# EAGLE board mic-preamp-stereo4 (EAGLE 6.2)
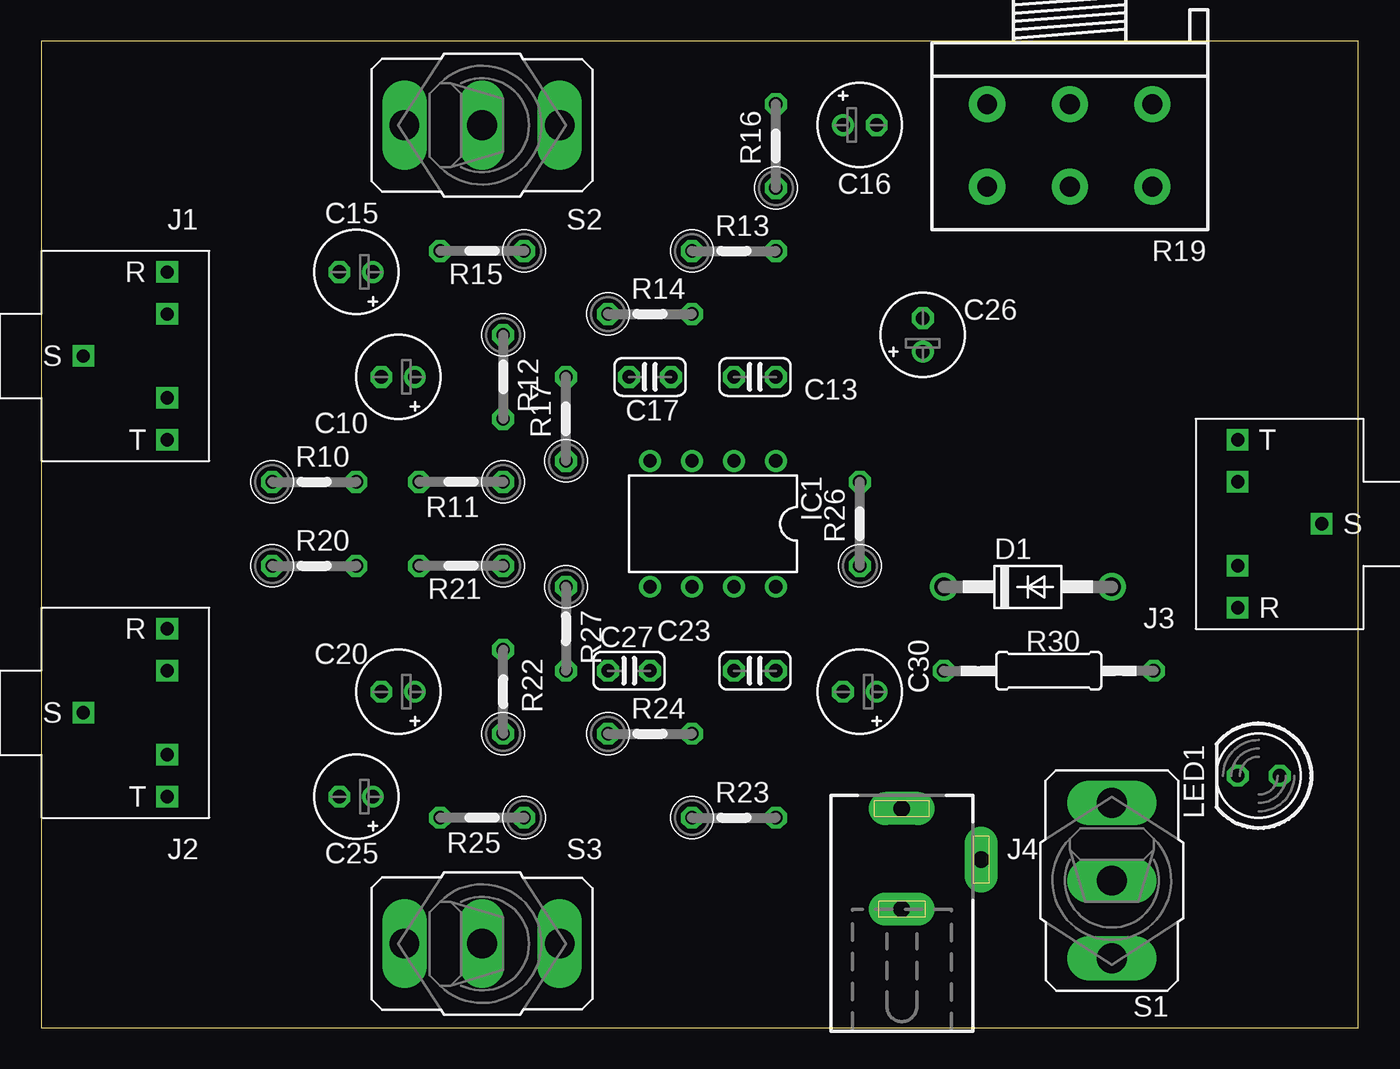
[diagram p0: board, top side]
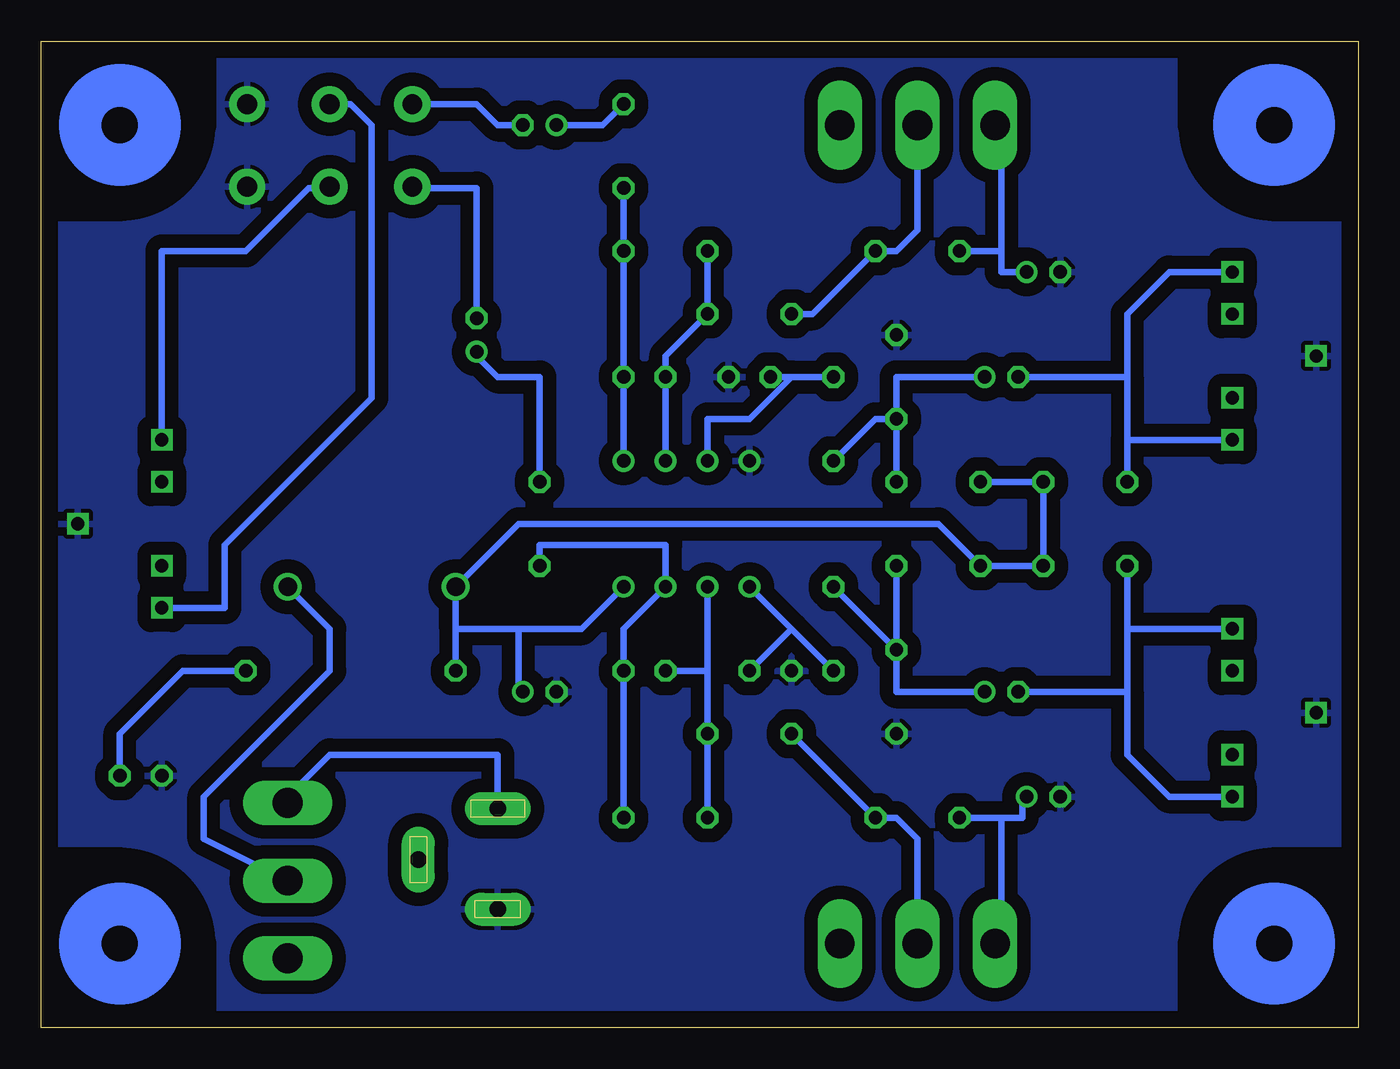
[diagram p1: board, bottom side, seen from below]

Size 79.68 x 59.68 mm. Coordinates in mm from the lower left corner, seen from the top.
Outline: 0,0 79.68,0 79.68,59.68 0,59.68 0,0
Copper layers 16: Bottom 0.035mm
Design rules: minimum track width 12mil, minimum drill 0.3mm, track to track 10mil, track to pad 10mil, pad to pad 10mil, via to via 10mil, smd to smd 10mil, copper to edge 40mil, drill to drill 8mil, minimum pad ring 10mil, minimum via ring 8mil, stop-mask expansion 8mil, vias tented up to drill 0mil, thermal gap 10mil
Net classes: 0 default: width 0.381 mm; 1 Ground: width 0.305 mm, clearance 0.229 mm
bRestrict: area 10.2,61 to 69.8,63.5; area 10.2,-3.8 to 69.8,-1.3; area -2.5,7.6 to -1.3,50.8; area -2.5,49.8 to 9.9,62.2; area 70.1,49.8 to 82.5,63.5; area 70.1,-2.5 to 82.5,9.9; area -2.5,-2.5 to 9.9,9.9; area 3.3,52.8 to 6.9,56.4; area 73.1,52.8 to 76.7,56.4; area 73.1,3.3 to 76.7,6.9; area 3.3,3.3 to 6.9,6.9

## Footprints (pad centres in the part's own frame; a part is rotated, then mirrored left to right if it is on the bottom)
E2-5 = drill 0.813 pad 1.27: + -1.016,0 | drill 0.813 pad 1.27 octagon: - 1.016,0
C025-024X044 = drill 0.813 octagon: 1 -1.27,0; 2 1.27,0
DO41-10 = drill 1.118: A 5.08,0; C -5.08,0
DIL08 = drill 0.813 pad 1.27: 1 -3.81,-3.81; 2 -1.27,-3.81; 3 1.27,-3.81; 4 3.81,-3.81; 5 3.81,3.81; 6 1.27,3.81; 7 -1.27,3.81; 8 -3.81,3.81
PICAXE_STEREOJACKSOCKET = drill 0.8 square: RING -5.08,-5.08; RING_SW -5.08,-2.54; SLEEVE 0,0; TIP -5.08,5.08; TIP_SW -5.08,2.54
DCJ0202 = drill 1 pad 2 long: 1 0,3.1; 2 4.8,0; 3 0,-3
LED5MM = drill 0.813 octagon: A -1.27,0; K 1.27,0
0207/5V = drill 0.813 octagon: 1 -2.54,0; 2 2.54,0
3RP/1610G = drill 1.2 pad 2.184: 1-1 -5,0; 1-2 0,0; 1-3 5,0; 2-1 -5,5; 2-2 0,5; 2-3 5,5
0207/12 = drill 0.813 octagon: 1 -6.35,0; 2 6.35,0
M9040P = drill 1.803 long: 1 0,4.699; 2 0,0; 3 0,-4.699

## Placement (x,y rotation side)
C10  2.2u  [E2-5]  21.59,39.37 180 top
C13  2.2p  [C025-024X044]  43.18,39.37 180 top
C15  10u  [E2-5]  19.05,45.72 180 top
C16  2.2u  [E2-5]  49.53,54.61 0 top
C17  4.7nF  [C025-024X044]  36.83,39.37 180 top
C20  2.2u  [E2-5]  21.59,20.32 180 top
C23  2.2p  [C025-024X044]  43.18,21.59 180 top
C25  10u  [E2-5]  19.05,13.97 180 top
C26  2.2u  [E2-5]  53.34,41.91 90 top
C27  4.7nF  [C025-024X044]  35.56,21.59 0 top
C30  47u  [E2-5]  49.53,20.32 180 top
D1  1N4004  [DO41-10]  59.69,26.67 0 top
IC1  TL072P  [DIL08]  40.64,30.48 180 top
J1  PICAXE_STEREOJACKSOCKET  [PICAXE_STEREOJACKSOCKET]  2.54,40.64 180 top
J2  PICAXE_STEREOJACKSOCKET  [PICAXE_STEREOJACKSOCKET]  2.54,19.05 180 top
J3  Stereo Out  [PICAXE_STEREOJACKSOCKET]  77.47,30.48 0 top
J4  DC 7-15VDC  [DCJ0202]  52.07,10.16 0 top
LED1  [LED5MM]  73.66,15.24 180 top
R10  10k  [0207/5V]  16.51,33.02 0 top
R11  27k  [0207/5V]  25.4,33.02 180 top
R12  27k  [0207/5V]  27.94,39.37 270 top
R13  33k  [0207/5V]  41.91,46.99 0 top
R14  1.5k  [0207/5V]  36.83,43.18 0 top
R15  27k  [0207/5V]  26.67,46.99 180 top
R16  100  [0207/5V]  44.45,53.34 90 top
R17  100  [0207/5V]  31.75,36.83 90 top
R19  [3RP/1610G]  62.23,55.88 180 top
R20  10k  [0207/5V]  16.51,27.94 0 top
R21  27k  [0207/5V]  25.4,27.94 180 top
R22  27k  [0207/5V]  27.94,20.32 90 top
R23  33k  [0207/5V]  41.91,12.7 0 top
R24  1.5k  [0207/5V]  36.83,17.78 0 top
R25  27k  [0207/5V]  26.67,12.7 180 top
R26  100  [0207/5V]  49.53,30.48 90 top
R27  100  [0207/5V]  31.75,24.13 270 top
R30  680  [0207/12]  60.96,21.59 180 top
S1  Power  [M9040P]  64.77,8.89 180 top
S2  [M9040P]  26.67,54.61 270 top
S3  [M9040P]  26.67,5.08 270 top

## Library data of the parts
C10 C13 C15-C17 C20 C23 C25-C27 C30 R10-R16 R20-R26 R30 = rcl
D1 = diode
IC1 = linear
J1-J3 = PICAXE_StereoJackSocket
J4 = con-jack; OC_FARNELL: unknown; OC_NEWARK: unknown
LED1 = led
R17 R27 = resistor
R19 = pot
S1-S3 = switch

## Nets
+9V: J4.1 S1.3
GND [Ground]: C15.- C17.1 C25.- C27.1 C30.- IC1.4 J1.SLEEVE J2.SLEEVE J3.SLEEVE J4.3 LED1.K R12.1 R19.1-1 R19.2-1 R22.1
N$1: C10.+ R11.1 R12.2 R17.1
N$2: C13.1 IC1.1 R13.2 R16.1
N$3: C13.2 IC1.2 R13.1 R14.2
N$4: C30.+ D1.C IC1.8 R10.2 R11.2 R20.2 R21.2 R30.2
N$5: R14.1 R15.1 S2.2
N$6: C16.+ R16.2
N$7: C10.- J1.RING J1.TIP R10.1
N$8: D1.A S1.2
N$9: C15.+ R15.2 S2.3
N$10: C16.- R19.1-3
N$11: LED1.A R30.1
N$12: C20.+ R21.1 R22.2 R27.1
N$13: C26.- R19.2-3
N$16: C23.1 IC1.7 R23.2 R26.1
N$17: C23.2 IC1.6 R23.1 R24.2
N$18: J3.TIP R19.2-2
N$19: R24.1 R25.1 S3.2
N$20: C26.+ R26.2
N$21: C20.- J2.RING J2.TIP R20.1
N$22: C25.+ R25.2 S3.3
N$23: J3.RING R19.1-2
N$24: C17.2 IC1.3 R17.2
N$27: C27.2 IC1.5 R27.2

## Tracks (layer width: path | path; a pad name or v marks a point on that pad's centre or on a via)
+9V
  Bottom 0.381: J4.1 52.07,16.51 62.23,16.51 64.77,13.97 S1.3
GND
  pour Bottom (isolate 0.813): 0,59.69 80.01,59.69 80.01,0 0,0
N$1
  Bottom 0.381: R12.2 27.94,39.37 C10.+ | R12.2 R11.1 | R17.1 29.21,36.83 R12.2
N$2
  Bottom 0.381: IC1.1 C13.1 R13.2 R16.1
N$3
  Bottom 0.381: IC1.2 C13.2 41.91,40.64 R14.2 R13.1
N$4
  Bottom 0.381: R11.2 R10.2 R20.2 R21.2 25.4,30.48 50.8,30.48 D1.C 54.61,24.13 | 50.8,24.13 50.8,20.32 C30.+ | 50.8,24.13 46.99,24.13 IC1.8 | 54.61,24.13 R30.2 | 50.8,24.13 54.61,24.13
N$5
  Bottom 0.381: R14.1 33.02,43.18 R15.1 27.94,46.99 26.67,48.26 S2.2
N$6
  Bottom 0.381: R16.2 45.72,54.61 C16.+
N$7
  Bottom 0.381: R10.1 13.97,35.56 | 13.97,35.56 J1.TIP | 13.97,39.37 13.97,43.18 11.43,45.72 J1.RING | C10.- 13.97,39.37 | 13.97,39.37 13.97,35.56
N$8
  Bottom 0.381: D1.A 62.23,24.13 62.23,21.59 69.85,13.97 69.85,11.43 S1.2
N$9
  Bottom 0.381: C15.+ 21.59,45.72 21.59,46.99 | R15.2 21.59,46.99 | 21.59,46.99 21.59,54.61 S2.3
N$10
  Bottom 0.381: C16.- 52.07,54.61 53.34,55.88 R19.1-3
N$11
  Bottom 0.381: R30.1 71.12,21.59 74.93,17.78 LED1.A
N$12
  Bottom 0.381: C20.+ 27.94,20.32 R22.2 | R22.2 R27.1 | R22.2 R21.1
N$13
  Bottom 0.381: C26.- 53.34,50.8 57.15,50.8 R19.2-3
N$16
  Bottom 0.381: R23.2 C23.1 44.45,24.13 IC1.7 41.91,29.21 49.53,29.21 R26.1
N$17
  Bottom 0.381: R23.1 R24.2 39.37,21.59 | 39.37,21.59 IC1.6 | C23.2 39.37,21.59
N$18
  Bottom 0.381: J3.TIP 72.39,46.99 67.31,46.99 63.5,50.8 62.23,50.8 R19.2-2
N$19
  Bottom 0.381: R24.1 R25.1 27.94,12.7 26.67,11.43 S3.2
N$20
  Bottom 0.381: R26.2 49.53,39.37 52.07,39.37 53.34,40.64 C26.+
N$21
  Bottom 0.381: 13.97,20.32 13.97,16.51 11.43,13.97 J2.TIP | C20.- 13.97,20.32 | 13.97,24.13 J2.RING | 13.97,20.32 13.97,24.13 | 13.97,24.13 R20.1
N$22
  Bottom 0.381: 21.59,12.7 R25.2 | 21.59,12.7 21.59,5.08 S3.3 | 21.59,12.7 20.32,12.7 20.32,13.97 C25.+
N$23
  Bottom 0.381: J3.RING 68.58,25.4 68.58,29.21 59.69,38.1 59.69,54.61 60.96,55.88 R19.1-2
N$24
  Bottom 0.381: C17.2 34.29,39.37 | 34.29,39.37 R17.2 | IC1.3 39.37,36.83 36.83,36.83 34.29,39.37
N$27
  Bottom 0.381: IC1.5 34.29,24.13 | 34.29,24.13 R27.2 | 34.29,24.13 C27.2
(copper drawn outside any net)
  shapes: Bottom circle x12

## Text on the board
tValues: Ⓛ | Gain | Ⓛ in | Ⓡ in | Stereo Out | (+) core | - | Ⓡ | + | Gain